# Altium PCB f1_bd_2.PcbDoc
Units mm, origin at the board's own origin, x right, y up, seen from the top; angles counter-clockwise.
Board outline 152.4 x 101.6 mm, 2 copper layers (Top Layer, Bottom Layer); 5 components, 42 nets, 44 pads, 0 vias.
Unrouted connection lines stored in the file: 3.
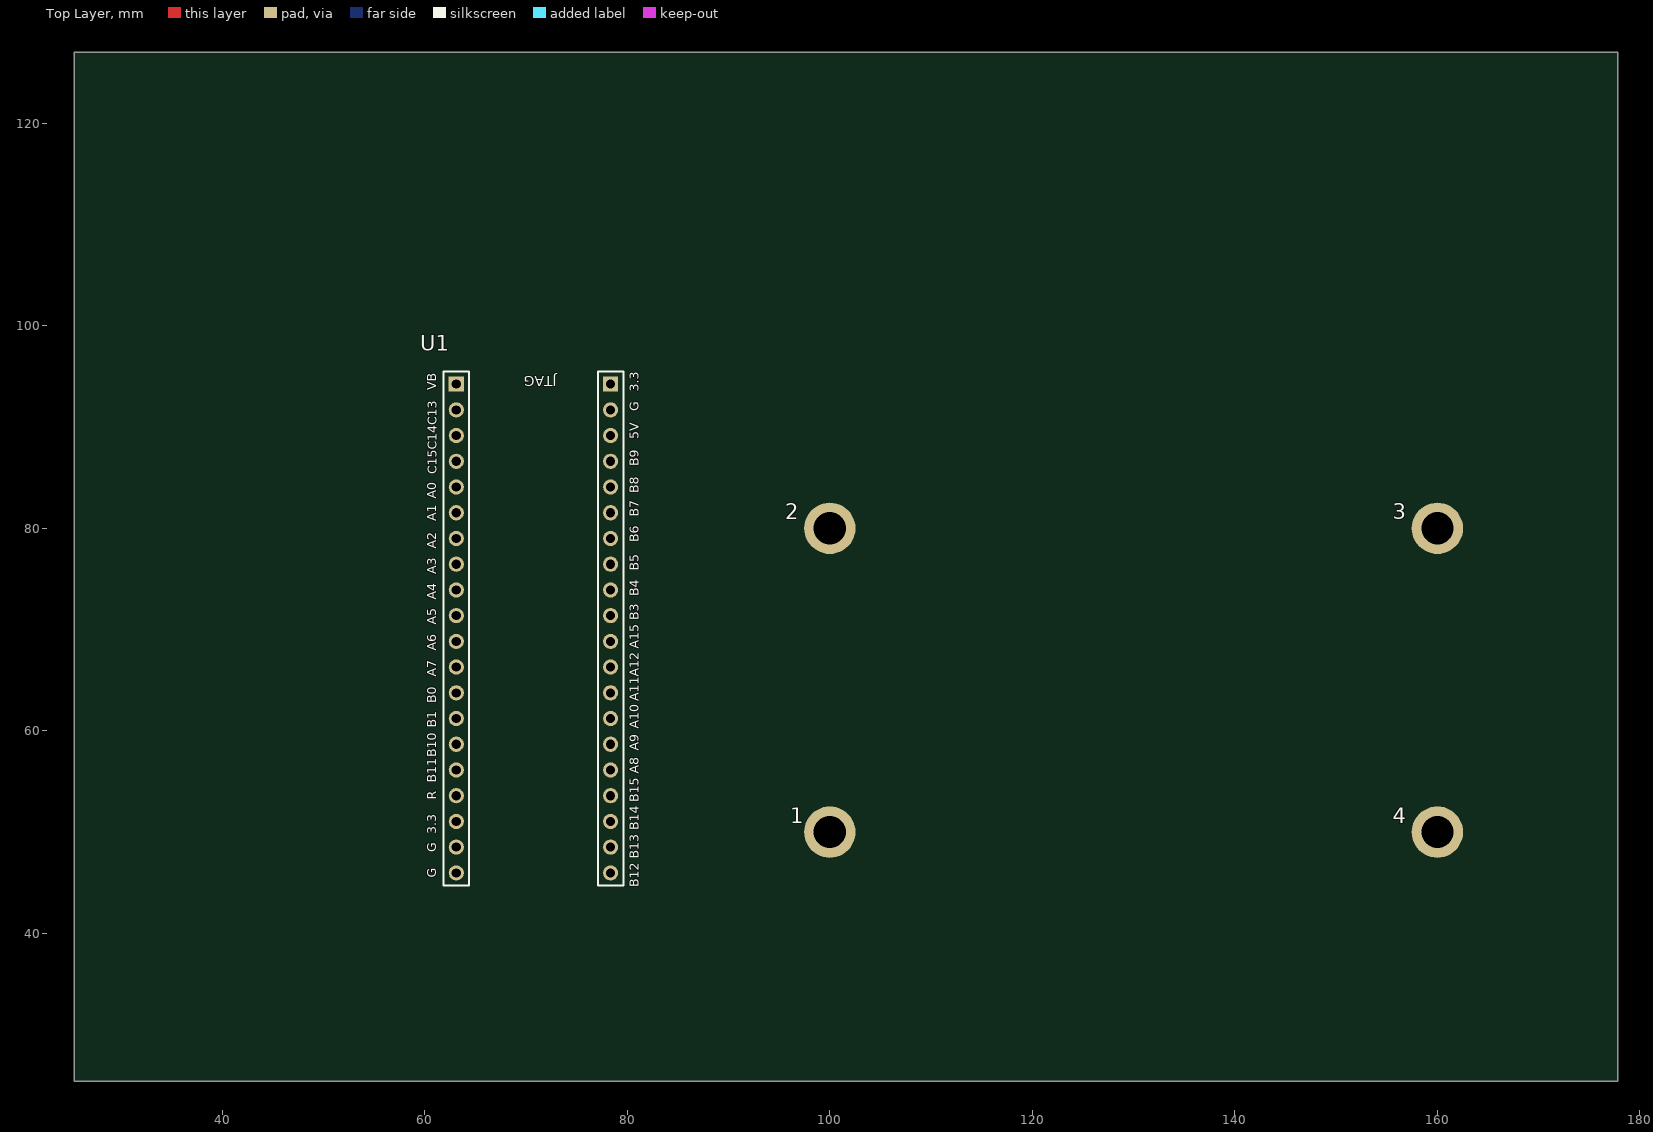
[diagram p0: Top Layer view]
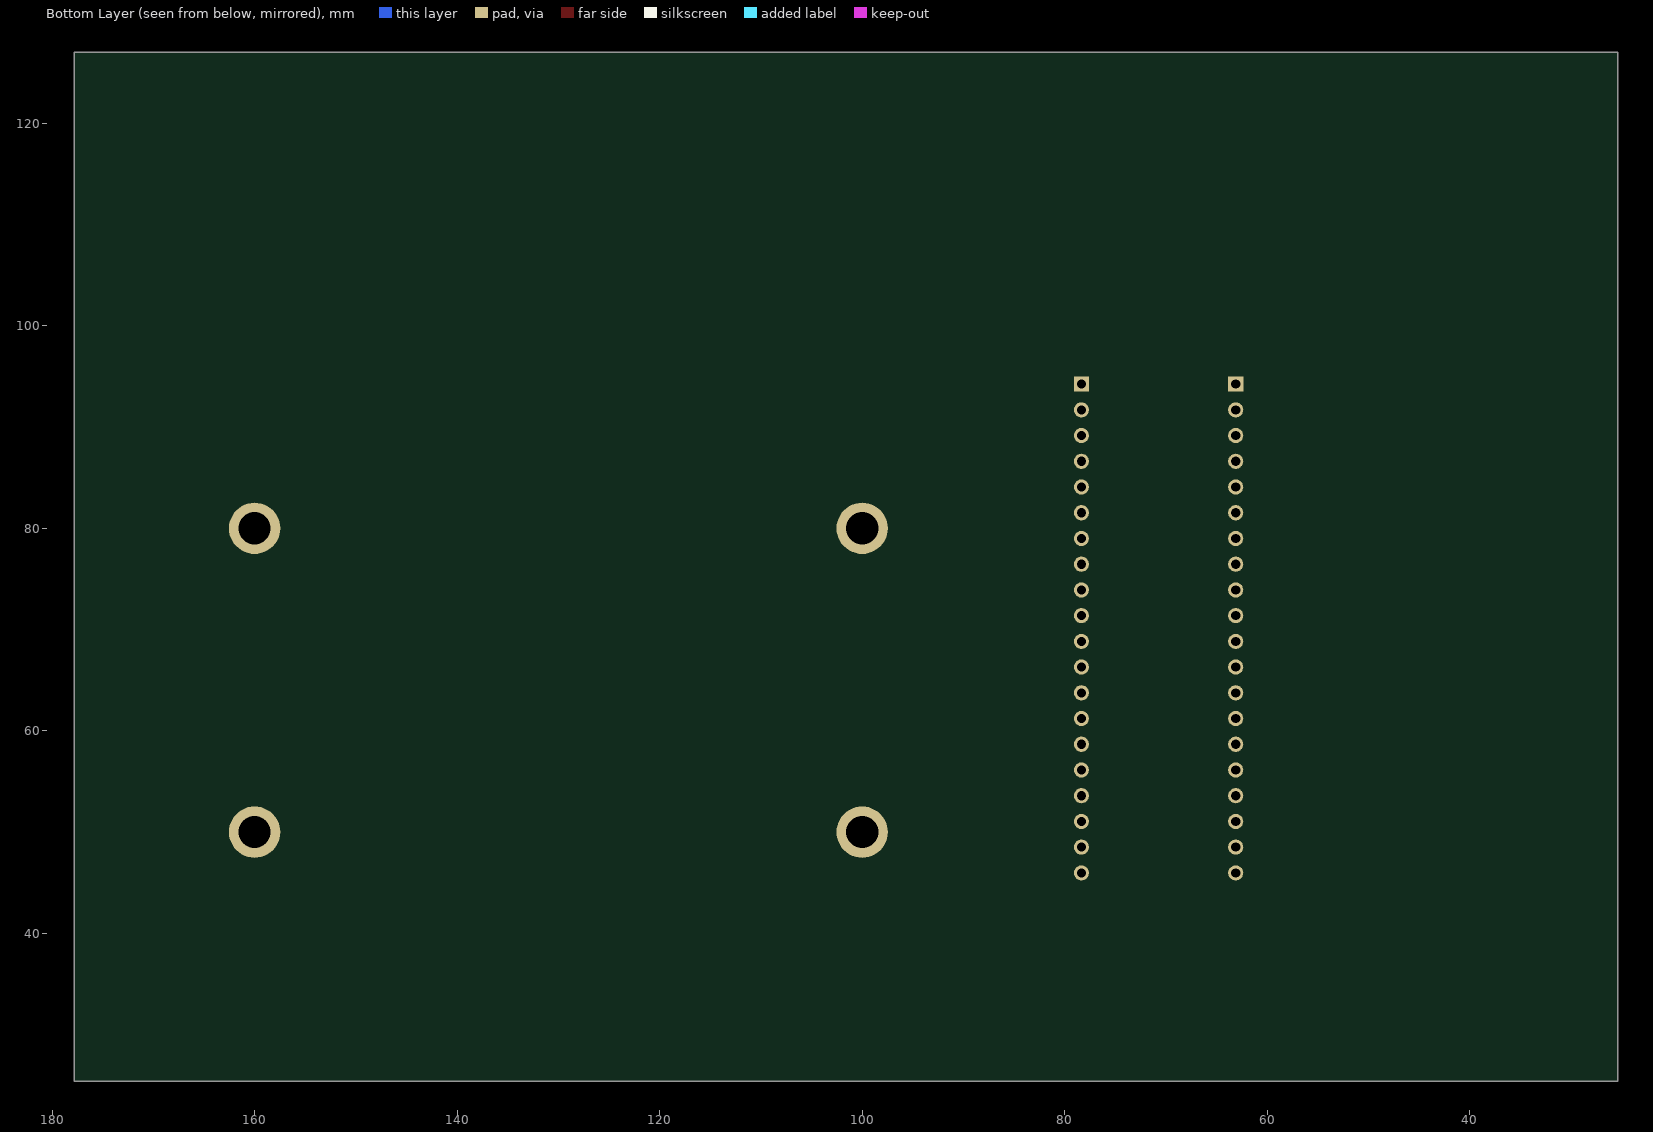
[diagram p1: Bottom Layer view, seen from below]

## Layer stack, top to bottom
Top Solder: solder mask 0.0102, Solder Resist, Dk 3.5
Top Layer: signal copper 0.0356
Dielectric 1: dielectric 0.32, FR-4, Dk 4.8
Bottom Layer: signal copper 0.0356
Bottom Solder: solder mask 0.0102, Solder Resist, Dk 3.5

## Board outline
25.4,25.4 177.8,25.4 177.8,127 25.4,127

## Design rules (kind name [scope] priority, off if disabled: settings)
Clearance [All] p1: gap=0.254 ignorepadtopadclearanceinfootprint=FALSE
PolygonConnect [All] p1: connectstyle=Relief reliefconductorwidth=0.254 reliefentries=4 polygonreliefangle="90 Angle" airgapwidth=0.254
RoutingVias [All] p1: holewidth=0.711 width=1.27 viastyle="Through Hole" minholewidth=0.711 minwidth=1.27 maxholewidth=0.711 maxwidth=1.27
SolderMaskExpansion [All] p1: expansion=0.102 istentingtop=FALSE
SupplyNets "Schematic Supply Nets_2" [InNet('3V3')] p1: voltage=0.000
SupplyNets "Schematic Supply Nets_1" [InNet('5V')] p2: voltage=0.000
SupplyNets "Schematic Supply Nets" [InNet('GND')] p3: voltage=0.000
Width [All] p1: maxlimit=0.254 minlimit=0.254 preferedwidth=0.254
30 further rules are at their usual default settings.

## Components (designator, comment, footprint, x,y, rotation, side; value= is the part's Value field where it differs from the comment)
1 "M3" "M3 125X200" 100,50 r90 top
2 "M3" "M3 125X200" 100,80 r90 top
3 "M3" "M3 125X200" 160,80 r90 top
4 "M3" "M3 125X200" 160,50 r90 top
U1 "f1_hw_2_gw" F1_HW_2_GW 70.485,70.358 r90 top

## Footprints (in the part's own frame and the unit in brackets; to place one, negate y for a bottom-side part, rotate by r counter-clockwise, add the part's x,y. Pads: shape width x height; smd on the part's side, far side on the other; paste and mask are expansions set on the pad)
F1_HW_2_GW [mm]
  rect 1.5x1.5 hole 0.9: 1(23.876,7.366) 21(23.876,-7.874)
  round 1.5 hole 0.9: 2(21.336,7.366) 3(18.796,7.366) 4(16.256,7.366) 5(13.716,7.366) 6(11.176,7.366) 7(8.636,7.366) 8(6.096,7.366) 9(3.556,7.366) 10(1.016,7.366) 11(-1.524,7.366) 12(-4.064,7.366) 13(-6.604,7.366) 14(-9.144,7.366) 15(-11.684,7.366) 16(-14.224,7.366) 17(-16.764,7.366) 18(-19.304,7.366) 19(-21.844,7.366) 20(-24.384,7.366) 22(21.336,-7.874) 23(18.796,-7.874) 24(16.256,-7.874) 25(13.716,-7.874) 26(11.176,-7.874) 27(8.636,-7.874) 28(6.096,-7.874) 29(3.556,-7.874) 30(1.016,-7.874) 31(-1.524,-7.874) 32(-4.064,-7.874) 33(-6.604,-7.874) 34(-9.144,-7.874) 35(-11.684,-7.874) 36(-14.224,-7.874) 37(-16.764,-7.874) 38(-19.304,-7.874) 39(-21.844,-7.874) 40(-24.384,-7.874)
  silkscreen extent -25.65,-9.14 25.15,8.64, body extent -26.92,-11.56 26.42,11.18, height 0.25
"M3 125X200" [mm] "M3螺丝孔，孔125Mil，焊盘200Mil"
  round 5.08 hole 3.175: 1(0,0)

## Part data
1 2 3 4: library part prot_m3, "m3铜柱孔", BOM名称=铜柱孔, 学习资源=www.ooocke.com, 版权归属=源创客

## Nets (pads, with @x,y where several pads share a name; then routed paths per layer and width w, separated by ;. In a path a pad name is that pad's centre, name@x,y a point inside that pad or via, vN(x,y) a via of type N, cw(c..) or ccw(c..) an arc to the next point about the centre after c; other vN are vias at no path point)
3V3: U1.18 U1.21
5V: U1.23
GND: U1.19 U1.20 U1.22
NetLED1_2: 
NetLED2_2: 
NetQ1_1: 
NetQ1_3: 
NRST: U1.17
PA0: U1.5
PA1: U1.6
PA2: U1.7
PA3: U1.8
PA4: U1.9
PA5: U1.10
PA6: U1.11
PA7: U1.12
PA8: U1.36
PA9: U1.35
PA10: U1.34
PA11: U1.33
PA12: U1.32
PA15: U1.31
PB0: U1.13
PB1: U1.14
PB3: U1.30
PB4: U1.29
PB5: U1.28
PB6: U1.27
PB7: U1.26
PB8: U1.25
PB9: U1.24
PB10: U1.15
PB11: U1.16
PB12: U1.40
PB13: U1.39
PB14: U1.38
PB15: U1.37
PC13: U1.2
PC14: U1.3
PC15: U1.4
TIM4_CH1: 
VBAT: U1.1
pads on no net: 1.1 2.1 3.1 4.1

## Text inside footprints (layer, text, board x,y; h text height)
U1: Top Overlay "JTAG" at 73.025,94.996 h1 r180; Top Overlay "R" at 61.163,53.213 h0.9 r90; Top Overlay "B11" at 61.163,54.889 h0.9 r90; Top Overlay "B10" at 61.163,57.404 h0.9 r90; Top Overlay "B1" at 61.163,60.325 h0.9 r90; Top Overlay "B0" at 61.163,62.738 h0.9 r90; Top Overlay "A0" at 61.163,82.931 h0.9 r90; Top Overlay "A1" at 61.163,80.67 h0.9 r90; Top Overlay "A2" at 61.163,77.96 h0.9 r90; Top Overlay "A3" at 61.163,75.474 h0.9 r90; Top Overlay "A4" at 61.163,72.949 h0.9 r90; Top Overlay "A5" at 61.163,70.46 h0.9 r90; Top Overlay "A6" at 61.163,67.894 h0.9 r90; Top Overlay "A7" at 61.163,65.354 h0.9 r90; Top Overlay "VB" at 61.163,93.624 h0.9 r90; Top Overlay "3.3" at 61.163,49.784 h0.9 r90; Top Overlay "G" at 61.163,48.031 h0.9 r90; Top Overlay "G" at 61.163,45.491 h0.9 r90; Top Overlay "B12" at 81.153,44.577 h0.9 r90; Top Overlay "B13" at 81.153,47.371 h0.9 r90; Top Overlay "B14" at 81.153,50.165 h0.9 r90; Top Overlay "B15" at 81.153,52.959 h0.9 r90; Top Overlay "A8" at 81.153,55.753 h0.9 r90; Top Overlay "A9" at 81.153,58.039 h0.9 r90; Top Overlay "A10" at 81.153,60.198 h0.9 r90; Top Overlay "A11" at 81.153,62.941 h0.9 r90; Top Overlay "A12" at 81.153,65.354 h0.9 r90; Top Overlay "A15" at 81.153,68.097 h0.9 r90; Top Overlay "B3" at 81.153,70.942 h0.9 r90; Top Overlay "B4" at 81.153,73.279 h0.9 r90; Top Overlay "B5" at 81.153,75.819 h0.9 r90; Top Overlay "B6" at 81.153,78.613 h0.9 r90; Top Overlay "B7" at 81.153,81.153 h0.9 r90; Top Overlay "B8" at 81.153,83.439 h0.9 r90; Top Overlay "B9" at 81.153,86.106 h0.9 r90; Top Overlay "5V" at 81.153,88.773 h0.9 r90; Top Overlay "G" at 81.153,91.567 h0.9 r90; Top Overlay "3.3" at 81.153,93.472 h0.9 r90; Top Overlay "C15C14C13" at 61.214,85.344 h0.9 r90